# Altium PCB 0810-T.PcbDoc
Units mm, origin at the board's own origin, x right, y up, seen from the top; angles counter-clockwise.
Board outline 28.8 x 9.6 mm, 4 copper layers (TopLayer, MidLayer1, MidLayer14, BottomLayer); 56 components, 35 nets, 144 pads, 45 vias.
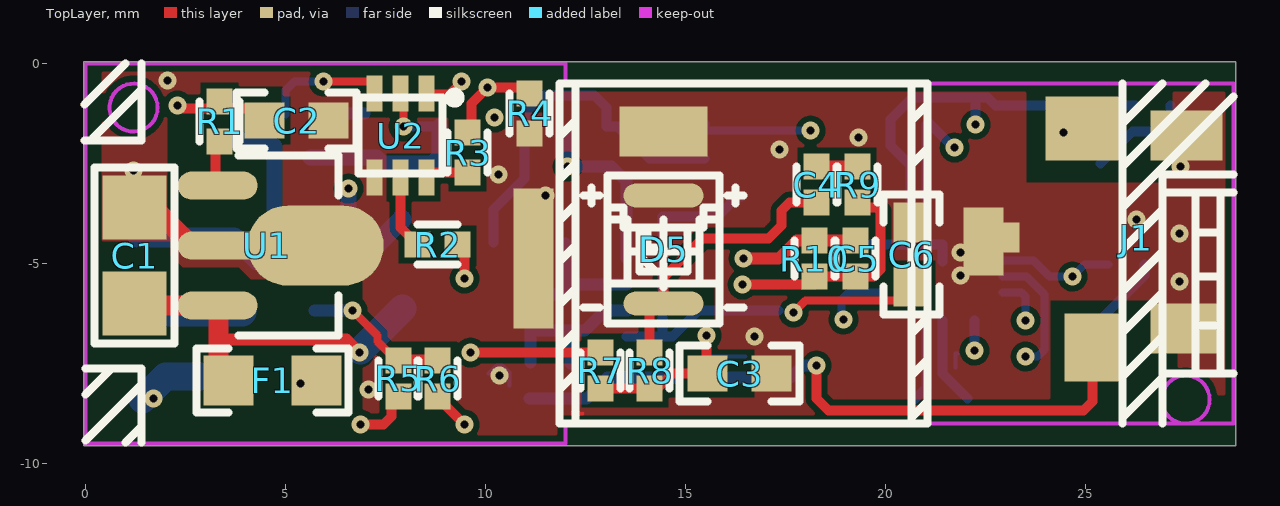
[diagram p0: TopLayer view]
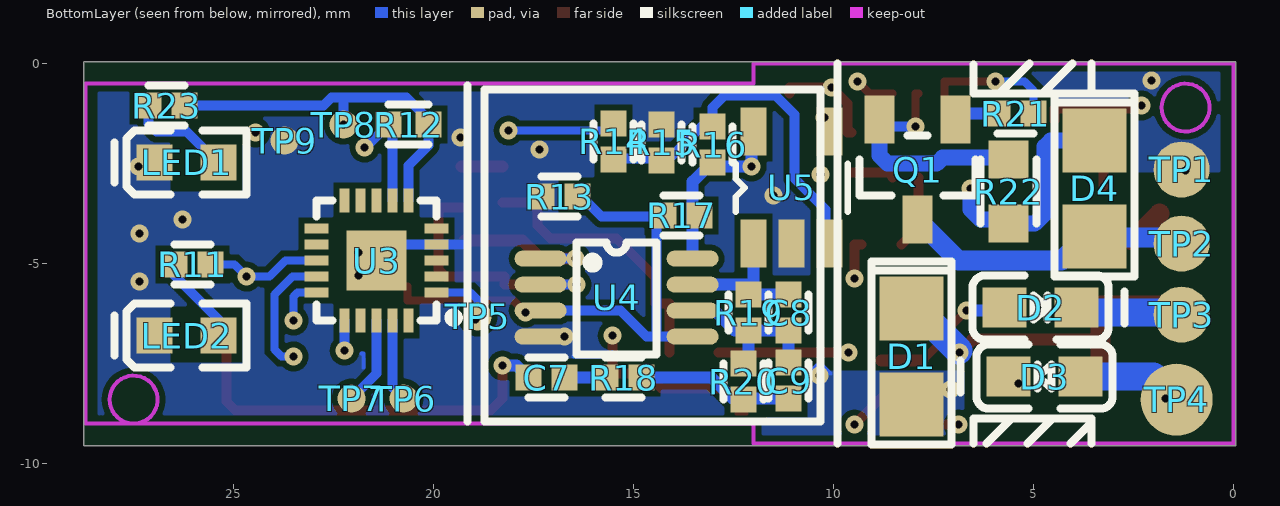
[diagram p1: BottomLayer view, seen from below]
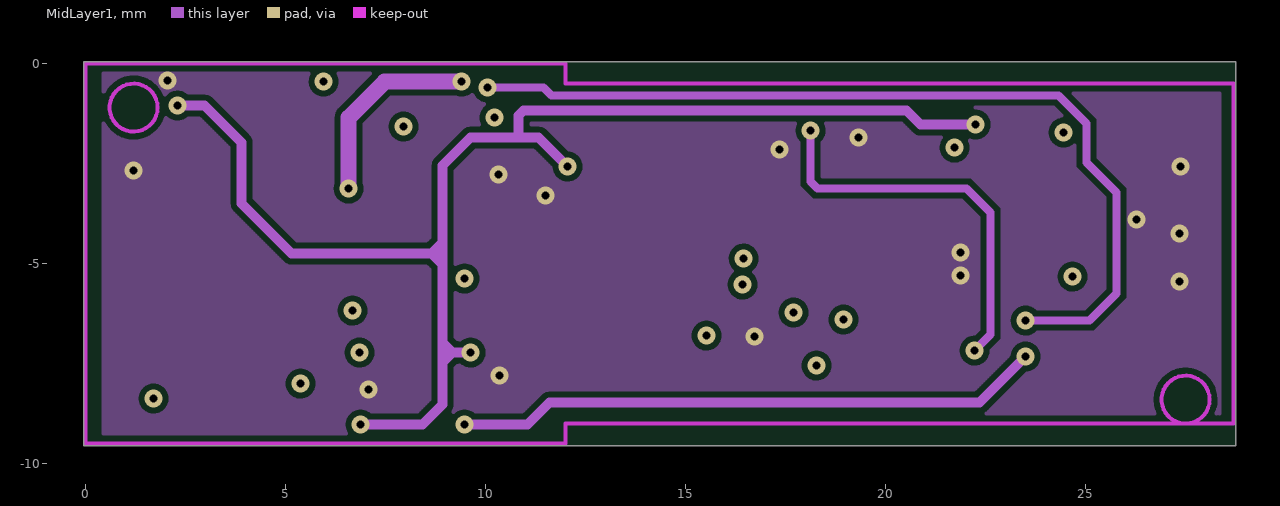
[diagram p2: MidLayer1]
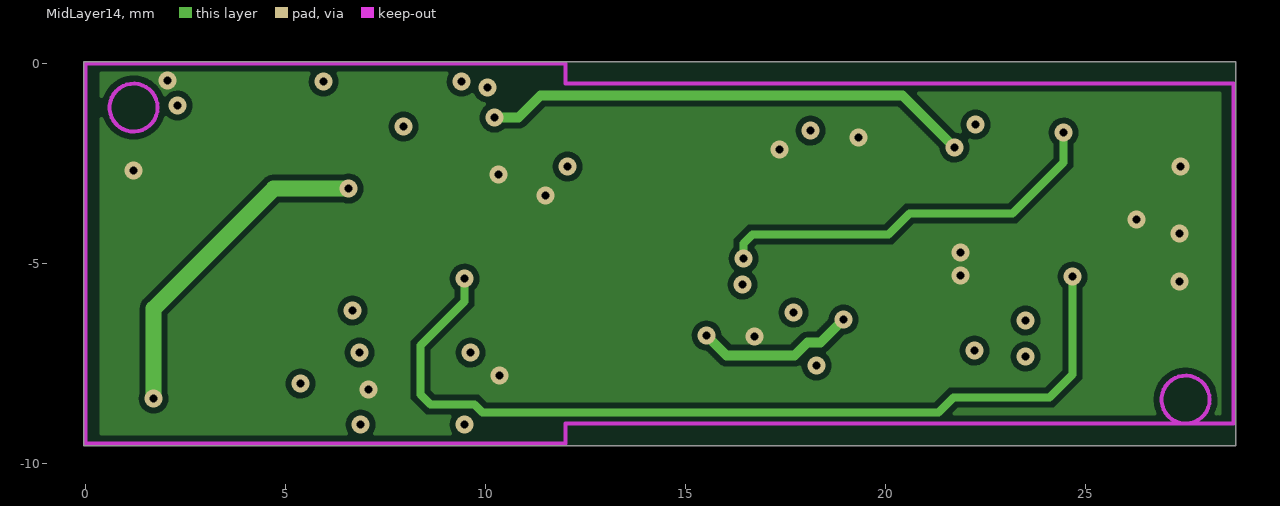
[diagram p3: MidLayer14]

## Layer stack, top to bottom
TopLayer: signal copper 0.0356
Dielectric: dielectric 0.32, FR-4, Dk 4.8
MidLayer1: signal copper 0.0356
Dielectric: dielectric 0.32, FR-4, Dk 4.8
MidLayer14: signal copper 0.0356
Dielectric: dielectric 0.32, FR-4, Dk 4.8
BottomLayer: signal copper 0.0356

## Board outline
-0.05,-9.55 28.75,-9.55 28.75,0.05 -0.05,0.05

## Design rules (kind name [scope] priority, off if disabled: settings)
Clearance [All] p1: gap=0.1
ComponentClearance [All] p1 off: gap=0.254 collisioncheckmode=0 verticalgap=0.254
PolygonConnect [All] p1: connectstyle=Relief reliefconductorwidth=0.254 reliefentries=4 polygonreliefangle="90 Angle"
RoutingLayers [All] p1: top layer_v5=TRUE mid layer 1_v5=FALSE mid layer 14_v5=FALSE bottom layer_v5=TRUE
RoutingVias [All] p1: holewidth=0.711 width=1.27 viastyle="Through Hole" minholewidth=0.711 minwidth=1.27 maxholewidth=0.711 maxwidth=1.27
SolderMaskExpansion [All] p1: expansion=0.051
TestPointUsage [All] p1: valid=0 allowmultiple=FALSE
Testpoint [All] p1: side=15 testpointundercomponent=TRUE minsize=1.016 maxsize=2.54 preferedsize=1.524 minholesize=0.508 maxholesize=1.016 preferedholesize=0.813 testpointgrid=0.025 style=1023 order=0123456789
Width [All] p1: maxlimit=0.254 minlimit=0.254 preferedwidth=0.254
17 further rules are at their usual default settings.

## Components (designator, comment, footprint, x,y, rotation, side; value= is the part's Value field where it differs from the comment)
C1 "1uF" 1206 1.225,-6 r90 top
C2 "10uF" 0805#1 6.075,-1.425 r180 top
C3 "10uF" 0805#1 17.15,-7.75 r180 top
C4 "470PF" 0402#1 18.275,-2.575 r270 top
C5 "2PF" 0402#1 19.25,-4.425 r270 top
C6 "10uF" 0805#1 20.65,-5.575 r90 top
C7 "100nF" 0402#2 16.725,-7.85 r180 bottom
C8 "10PF" 0402#1 11.125,-5.775 r270 bottom
C9 "1nF" 0402#1 11.125,-7.475 r270 bottom
D1 "M1" 1206 8.05,-8.525 r90 bottom
D2 "W2" 0805A 3.925,-6.1 r90 bottom
D3 "W2" 0805A 5.625,-7.825 r270 bottom
D4 "CM" 1206 3.475,-4.325 r90 bottom
D5 "F5红外线接收管" LED5.0 14.45,-3.3 r0 top
F1 "V" 0805#2 3.575,-7.925 r0 top
J1 "电位器板" SIP4 25.175,-7.1 r0 top
LED1 "黄色LED" 0603 25.375,-2.475 r180 bottom
LED2 "红色LED" 0603 25.375,-6.8 r180 bottom
Q1 "AKR" SOT-23 6.95,-1.4 r180 bottom
R1 "10R" 0402#3 3.35,-0.95 r270 top
R2 "4.7K" 0402#3 9.3,-4.525 r180 top
R3 "20K" 0402#3 9.55,-1.725 r270 top
R4 "3.9K" 0402#3 11.1,-0.75 r270 top
R5 "10K" 0402#1 7.825,-7.425 r270 top
R6 "10K" 0402#1 8.8,-7.425 r270 top
R7 "10K" 0402#1 12.875,-7.225 r270 top
R8 "200K" 0402#1 14.1,-7.225 r270 top
R9 "10K" 0402#1 19.3,-2.575 r270 top
R10 "470K" 0402#1 18.225,-4.425 r270 top
R11 "4.7K" 0402#2 25.575,-5.025 r180 bottom
R12 "47K" 0402#4 21.125,-1.525 r0 bottom
R13 "10K" 0402#2 16.4,-3.325 r180 bottom
R14 "150K" 0402#1 15.5,-1.5 r270 bottom
R15 "8.2K" 0402#1 14.3,-1.525 r270 bottom
R16 "10K" 0402#1 13.025,-1.575 r270 bottom
R17 "10K" 0402#2 13.35,-3.8 r180 bottom
R18 "1K" 0402#2 14.8,-7.85 r180 bottom
R19 "30K" 0402#1 12.125,-5.775 r270 bottom
R20 "1K" 0402#1 12.25,-7.5 r270 bottom
R21 "20K" 0402#2 5,-1.25 r180 bottom
R22 "3R/3R0" 0603L 5.625,-4 r90 bottom
R23 "2.2K" 0402#2 26.225,-1.05 r180 bottom
TP1 "" SIP1#1 1.3,-2.65 r0 bottom
TP2 "" SIP1#1 1.3,-4.5 r0 bottom
TP3 "" SIP1#1 1.3,-6.275 r0 bottom
TP4 "" SIP1#2 1.425,-8.4 r0 bottom
TP5 "" SIP1#3 18.9,-6.325 r0 bottom
TP6 "" SIP1#3 20.75,-8.375 r0 bottom
TP7 "" SIP1#3 22.05,-8.375 r0 bottom
TP8 "" SIP1#3 22.25,-1.525 r0 bottom
TP9 "" SIP1#3 23.725,-1.925 r0 bottom
U1 "78L05" SOT89 3.3,-3.05 r0 top
U2 "1AG" SOP-6A 8.525,-0.75 r90 top
U3 "???" QFN20 19.925,-5.725 r270 bottom
U4 "GS358" MSOP-8A 17.325,-4.875 r90 bottom
U5 "V331R" SOP5D 12,-4.5 r270 bottom

## Footprints (in the part's own frame and the unit in brackets; to place one, negate y for a bottom-side part, rotate by r counter-clockwise, add the part's x,y. Pads: shape width x height; smd on the part's side, far side on the other; paste and mask are expansions set on the pad)
0402#1 [mm]
  rect 0.65x0.65 smd: 1(0,0) 2(0.9,0)
  silkscreen extent 0,-0.5 0.9,0.5
0402#2 [mm]
  rect 0.65x0.65 smd: 1(0,0) 2(-0.9,0)
  silkscreen extent -0.9,-0.5 0,0.5
0402#3 [mm]
  rect 0.65x0.65 smd: 1(0,0) 2(1,0)
  silkscreen extent 0,-0.5 1,0.5
0402#4 [mm]
  rect 0.65x0.65 smd: 1(0,0) 2(-1,0)
  silkscreen extent -1,-0.5 0,0.5
0603 [mm]
  rect 0.9x0.9 smd: 1(0,0) 2(-1.6,0)
  silkscreen extent -2.6,-0.8 0.7,0.8
0603L [mm]
  rect 0.95x1 smd: 1(0,0) 2(1.6,0)
  silkscreen extent 0,-0.7 1.6,0.7
0805#1 [mm]
  rect 1x0.9 smd: 1(0,0) 2(1.6,0)
  silkscreen extent -0.7,-0.7 2.3,0.7
0805#2 [mm]
  rect 1.25x1.25 smd: 1(0,0) 2(2.2,0)
  silkscreen extent -0.8,-0.8 3,0.8
0805A [mm]
  rect 1x1.1 smd: 1(0,0) 2(0,1.8)
  silkscreen extent -0.8,-1.2 0.8,2.6
1206 [mm]
  rect 1.6x1.6 smd: 1(0,0) 2(2.4,0)
  silkscreen extent -1,-1 3.4,1
LED5.0 [mm]
  oval 2x0.6 smd: 1(0,0) 2(0,-2.7)
  silkscreen extent -2,-3.2 2,0.5
MSOP-8A [mm]
  oval 0.4x1.3 smd: 1(0,0) 2(-0.65,0) 3(-1.3,0) 4(-1.95,0) 5(-1.95,-3.8) 6(-1.3,-3.8) 7(-0.65,-3.8) 8(0,-3.8)
  silkscreen extent -2.4,-2.9 0.4,-0.9
QFN20 [mm]
  rect 0.25x0.6 smd: 1(0,0) 2(-0.4,0) 3(-0.8,0) 4(-1.2,0) 5(-1.6,0) 11(-1.6,-3) 12(-1.2,-3) 13(-0.8,-3) 14(-0.4,-3) 15(0,-3)
  rect 0.6x0.25 smd: 6(-2.3,-0.7) 7(-2.3,-1.1) 8(-2.3,-1.5) 9(-2.3,-1.9) 10(-2.3,-2.3) 16(0.7,-2.3) 17(0.7,-1.9) 18(0.7,-1.5) 19(0.7,-1.1) 20(0.7,-0.7)
  rect 1.5x1.5 smd: 21(-0.8,-1.5)
  silkscreen extent -2.3,-3 0.7,0.5
SIP1#1 [mm]
  round 1.4 smd: 1(0,0)
SIP1#2 [mm]
  round 1.8 smd: 1(0,0)
SIP1#3 [mm]
  round 0.7 smd: 1(0,0)
SIP4 [mm]
  rect 1.4x1.7 smd: 1(0,0)
  rect 1.8x1.25 smd: 2(2.35,0.475) 3(2.35,5.3)
  rect 2x1.6 smd: 4(-0.175,5.475)
  silkscreen extent 0.75,-1.9 3.52,6.6
SOP5D [mm]
  rect 1.2x0.65 smd: 1(0,0) 2(0,0.95) 3(0,1.9) 4(-2.8,1.9) 5(-2.8,0)
  silkscreen extent -2,-0.45 -0.8,2.35
SOP-6A [mm]
  rect 0.9x0.4 smd: 1(0,0) 2(0,0.65) 3(0,1.3) 4(-2.1,1.3) 5(-2.1,0.65) 6(-2.1,0)
  silkscreen extent -2,-0.8 0,1.7
SOT89 [mm]
  oval 3.4x2 smd: 0(2.45,-1.5)
  oval 2x0.7 smd: 1(0,0) 3(0,-3)
  oval 2.4x0.7 smd: 2(0.2,-1.5)
  silkscreen extent 0.53,-3.75 3.03,0.75
SOT-23 [mm]
  rect 0.75x1.2 smd: 1(0,0) 2(-1.9,0) 3(-0.95,-2.5)
  silkscreen extent -2.4,-1.9 0.5,-0.4

## Free pads (board coordinates)
  rect 2.2x1.25 smd: 1(14.45,-1.7)
  rect 0.75x0.75 smd: 2(22.975,-4.35)
  rect 1x1.7 smd: 3(22.45,-4.45)
  rect 1x3.5 smd: 4(11.2,-4.875)

## Via types
v1: diameter 0.45, hole 0.2, TopLayer to BottomLayer, 45 vias

## Nets (pads, with @x,y where several pads share a name; then routed paths per layer and width w, separated by ;. In a path a pad name is that pad's centre, name@x,y a point inside that pad or via, vN(x,y) a via of type N, cw(c..) or ccw(c..) an arc to the next point about the centre after c; other vN are vias at no path point)
UnNamedNet1: C6.1 R13.1 R17.2 U4.3 U4.5 | length 12.6
  TopLayer w0.2: v1(17.7,-6.225) 18,-5.925 20.65,-5.925 C6.1
  BottomLayer w0.25: U4.5 14.675,-6.825 15.325,-6.175 U4.3 ; 14.425,-6.775 14.425,-3.825 15.8,-3.825 16.3,-3.325 R13.1
UnNamedNet2: C1.2 C2.1 C3.1 C6.2 D1.1 D5.1 J1.2 J1.3 LED1.2 LED2.2 pad.1 pad.2 pad.3 pad.4 R4.2 R13.2 R15.1 TP1.1 TP9.1 U1.0 U1.2 U2.4 U3.4 U3.21 U4.4 U5.2 | length 6.7
  TopLayer w0.1: 12.175,-8.75 12.425,-8.75
  TopLayer w0.5: C1.2@1.85,-3.75 U1.2@2.525,-4.425
  BottomLayer w0.1: 10.075,-7.75 10.275,-7.55 10.425,-7.55 10.6,-7.725 10.6,-8.05 ; v1@10.225,-7.675 v1@10.5,-7.675 ; v1@10.225,-7.625 v1@10.45,-7.625 ; 15.525,-7.225 15.525,-7.325 16.5,-7.325 ; 21.75,-7.6 21.75,-7.25 21.8,-7.25
  BottomLayer w0.25: 19.3,-4.525 U3.4 21.425,-4.525 U3.21@21.425,-4.95
  other v1: 7.075,-8.15 10.35,-7.8 16.725,-6.825 27.35,-5.45 21.875,-5.3 21.875,-4.725 27.35,-4.25 26.275,-3.9 11.5,-3.3 10.325,-2.775 1.2,-2.675 27.375,-2.575 17.35,-2.15 19.325,-1.85 2.05,-0.425
UnNamedNet3: C7.2 J1.1 | length 10.1
  TopLayer w0.25: v1(18.275,-7.55) 18.275,-8.375 18.575,-8.675 24.95,-8.675 25.175,-8.45 J1.1
  BottomLayer w0.3: C7.2 17.925,-7.55 v1(18.275,-7.55)
UnNamedNet4: C5.1 J1.4 R10.1 U4.1 | length 13.7
  TopLayer w0.3: v1@16.425,-4.875 17.325,-4.875 17.775,-4.425 C5.1@19.225,-4.425
  MidLayer14 w0.2: v1@16.45,-4.85 16.45,-4.5 16.675,-4.275 20.075,-4.275 20.6,-3.75 23.175,-3.75 24.45,-2.475 v1@24.45,-1.825
  BottomLayer w0.25: v1(16.45,-4.875) U4.1
  other v1: 24.45,-1.725
UnNamedNet5: C4.2 D5.2 R8.1 | length 7
  TopLayer w0.25: R8.1 14.1,-6 D5.2 14.45,-5.35 15.425,-4.375 17.075,-4.375 17.4,-4.05 17.4,-3.675 17.6,-3.475 C4.2
UnNamedNet6: C1.1 D1.2 F1.1 U1.3 | length 9.4
  TopLayer w0.3: 3.325,-6.9 6.525,-6.9 v1(6.85,-7.225)
  TopLayer w0.5: C1.1@1.2,-6.05 3.325,-6.05 3.325,-7.925 F1.1
  BottomLayer w0.7: v1@6.875,-7.175 D1.2@7.925,-6.125
UnNamedNet7: D3.1 F1.2
  other v1: 5.375,-8
UnNamedNet8: D3.2 D4.2 R22.1 TP4.1 U2.1 | length 22.5
  TopLayer w0.2: U2.1 9.1,-0.75 v1(9.4,-0.45)
  MidLayer1 w0.4: v1(6.575,-3.125) 6.575,-1.35 7.475,-0.45 v1@9.35,-0.45
  MidLayer14 w0.4: v1(1.7,-8.375) 1.7,-6.125 4.7,-3.125 v1(6.575,-3.125)
  BottomLayer w0.4: D4.2 4.575,-1.925 4.725,-2.075 4.725,-3.75 4.975,-4 R22.1 5.625,-3.9 6.325,-3.9 6.575,-3.65 v1(6.575,-3.125)
  BottomLayer w0.7: TP4.1 2,-7.825 D3.2@3.75,-7.825
UnNamedNet9: Q1.2 R22.2 U2.2 | length 5.9
  TopLayer w0.2: U2.2 7.95,-0.75 v1@7.95,-1.55
  BottomLayer w0.252: v1(7.95,-1.575) Q1.2@8.85,-1.575
  BottomLayer w0.4: R22.2@5.625,-2.35 7.275,-2.35 7.425,-2.5 8.65,-2.5 8.85,-2.3 Q1.2@8.85,-1.575
UnNamedNet10: R21.1 U2.3 | length 3.2
  TopLayer w0.2: v1(5.95,-0.45) 7.225,-0.45 U2.3@7.225,-0.775
  BottomLayer w0.2: R21.1@5,-1.275 5,-0.675 5.225,-0.45 v1(5.95,-0.45)
UnNamedNet11: R3.2 U2.6 | length 1.2
  TopLayer w0.25: U2.6 8.525,-2.725 R3.2
UnNamedNet12: R2.2 U2.5 | length 1.9
  TopLayer w0.25: U2.5 7.875,-4.1 R2.2
UnNamedNet13: R1.2 U1.1 | length 1.2
  TopLayer w0.25: U1.1@3.25,-3.075 3.25,-1.95 R1.2
UnNamedNet14: C4.1 R9.1 | length 1
  TopLayer w0.3: C4.1 R9.1
UnNamedNet15: C5.2 R9.2 R10.2 U4.2 | length 6.7
  TopLayer w0.25: v1(16.425,-5.525) 18.225,-5.525 R10.2 19.7,-5.325 19.875,-5.15 19.875,-3.7 19.775,-3.6 R9.2@19.3,-3.6
  BottomLayer w0.25: v1@16.45,-5.525 U4.2
UnNamedNet16: C3.2 R7.2 R8.2 TP5.1 U3.1 | length 9.3
  TopLayer w0.25: R7.2 14.3,-8.125 14.675,-7.75 15.525,-7.75 v1(15.525,-6.8)
  MidLayer14 w0.25: v1(15.525,-6.8) 16.025,-7.3 17.725,-7.3 18.05,-6.975 18.375,-6.975 v1(18.95,-6.4)
  BottomLayer w0.2: TP5.1@18.9,-6.35 18.9,-5.9 19.075,-5.725 U3.1
UnNamedNet17: C2.2 R1.1 R5.2 R7.1 R12.2 R16.2 R17.1 R23.1 TP8.1 U3.6 U4.8 U5.5 | length 57.4
  TopLayer w0.25: v1(2.3,-1.05) 2.3,-1.125 4.475,-1.125 C2.2 ; v1(6.875,-9.025) 7.45,-9.025 7.65,-8.825 7.65,-8.325 R5.2 ; v1(9.625,-7.225) R7.1
  MidLayer1 w0.25: v1(2.3,-1.05) 2.975,-1.05 3.9,-1.975 3.9,-3.5 5.15,-4.75 8.875,-4.75 8.65,-4.75 ; v1(6.875,-9.025) 8.425,-9.025 8.925,-8.525 8.925,-2.55 9.625,-1.85 11.325,-1.85 v1(12.05,-2.575) ; 8.925,-7.475 9.175,-7.225 ; 8.925,-5.025 8.65,-4.75 ; v1(9.625,-7.225) 8.95,-7.225 9.175,-7.225 ; 10.825,-1.8 10.825,-1.3 10.95,-1.175 20.525,-1.175 20.875,-1.525 v1(22.25,-1.525) ; 8.65,-4.75 8.9,-4.5 8.65,-4.75 ; 9.175,-7.225 8.925,-6.975 9.175,-7.225
  BottomLayer w0.25: U3.6 20.625,-2.55 20.125,-2.05 20.125,-1.4 20.675,-0.85 22.55,-0.85 22.75,-1.05 R23.1@26.25,-1.05 ; v1(22.25,-1.525) 22.25,-0.875
  BottomLayer w0.3: U5.5@12.05,-1.7 v1(12.05,-2.575) 13.15,-2.575 13.525,-2.95 U4.8
UnNamedNet18: R6.2 U3.14 | length 18.8
  TopLayer w0.25: R6.2@8.8,-8.35 v1(9.475,-9.025)
  MidLayer1 w0.25: v1(9.475,-9.025) 11.05,-9.025 11.6,-8.475 22.35,-8.475 v1(23.5,-7.325)
  BottomLayer w0.2: U3.14 23.525,-5.325 23.975,-5.775 23.975,-7.15 23.8,-7.325 v1(23.5,-7.325)
UnNamedNet19: D2.2 R5.1 R6.1 | length 3.7
  TopLayer w0.2: v1(6.675,-6.175) 7.3,-6.8 7.3,-6.95 R5.1@7.775,-7.425
  TopLayer w0.3: R5.1@7.775,-7.425 R6.1
  BottomLayer w0.3: D2.2@5.725,-6.175 v1(6.675,-6.175)
UnNamedNet20: R3.1 R4.1 U3.15 | length 26.3
  TopLayer w0.25: R3.1 9.65,-1.725 9.65,-1 v1(10.05,-0.6) 11.1,-0.6 R4.1
  MidLayer1 w0.2: v1(10.05,-0.6) 11.45,-0.6 11.65,-0.8 24.325,-0.8 25.025,-1.5 25.025,-2.475 25.775,-3.225 25.775,-5.75 25.1,-6.425 v1(23.5,-6.425)
  BottomLayer w0.2: U3.15 23.4,-5.725 23.5,-5.825 v1(23.5,-6.425)
UnNamedNet21: R2.1 R11.1 U3.13 | length 26.6
  TopLayer w0.25: R2.1 9.475,-4.525 v1(9.475,-5.375)
  MidLayer14 w0.2: v1@9.475,-5.4 9.475,-5.95 8.375,-7.05 8.375,-8.275 8.625,-8.525 9.725,-8.525 9.925,-8.725 21.325,-8.725 21.7,-8.35 24.1,-8.35 24.675,-7.775 v1(24.675,-5.325)
  BottomLayer w0.2: U3.13 23.7,-4.925 24.1,-5.325 v1(24.675,-5.325) 24.975,-5.025 R11.1
UnNamedNet22: R14.1 U3.16 | length 13.3
  MidLayer1 w0.2: v1(18.125,-1.675) 18.125,-2.95 18.3,-3.125 22.025,-3.125 22.625,-3.725 22.625,-6.775 v1(22.225,-7.175)
  BottomLayer w0.2: R14.1 15.5,-1.675 v1(18.125,-1.675)
  BottomLayer w0.25: v1(22.225,-7.175) U3.16
UnNamedNet23: R14.2 R15.2 R16.1 U5.3 | length 9.1
  BottomLayer w0.252: U5.3@10.2,-4.475 10.2,-3.65 10.975,-2.875 10.975,-1.275 11.45,-0.8 12.725,-0.8 13.025,-1.1 R16.1 13.3,-1.575 14.1,-2.375 R14.2@15.475,-2.375
UnNamedNet24: LED1.1 R23.2 | length 2.6
  BottomLayer w0.25: LED1.1@25.375,-2.5 26.175,-1.7 26.925,-1.7 27.125,-1.5 R23.2
UnNamedNet25: LED2.1 R11.2 | length 2.2
  BottomLayer w0.25: LED2.1 25.375,-6.4 26.475,-5.3 R11.2
UnNamedNet26: C8.1 R19.1 U4.7 U5.1 | length 3.6
  BottomLayer w0.3: C8.1 12,-5.775 U5.1 ; R19.1@12.075,-5.525 U4.7
UnNamedNet27: C8.2 C9.1 R19.2 R20.1 U4.6 | length 4.3
  BottomLayer w0.3: C9.1 C8.2 R19.2 ; R20.1@12.125,-7.5 R19.2 ; U4.6@13.55,-6.175 12.975,-6.175 12.475,-6.675 R19.2
UnNamedNet28: C9.2 R18.1 R20.2 | length 3.9
  BottomLayer w0.3: C9.2@11.1,-8.375 12.525,-8.375 13.05,-7.85 R18.1@14.75,-7.85
UnNamedNet29: C7.1 R18.2 | length 1.1
  BottomLayer w0.3: R18.2@15.675,-7.85 C7.1
UnNamedNet30: D2.1 TP3.1 | length 2.7
  BottomLayer w0.7: TP3.1@1.3,-6.225 3.925,-6.225 D2.1
UnNamedNet31: D4.1 Q1.3 TP2.1 | length 7.3
  BottomLayer w0.5: TP2.1@1.3,-4.35 3.725,-4.35 4.3,-4.925 6.875,-4.925 Q1.3
UnNamedNet32: Q1.1 R21.2 | length 1.1
  BottomLayer w0.3: R21.2 Q1.1@6.975,-1.25
UnNamedNet33: R12.1 U3.7 U5.4 | length 15.1
  MidLayer14 w0.25: v1(10.225,-1.35) 10.825,-1.35 11.375,-0.8 20.425,-0.8 v1(21.725,-2.1)
  BottomLayer w0.25: U3.7 21.025,-1.525 21.075,-1.475 v1@21.675,-2.075
UnNamedNet43: TP7.1 U3.18 | length 2.2
  BottomLayer w0.25: U3.18 21.425,-7.75 TP7.1
UnNamedNet44: TP6.1 U3.19 | length 2.1
  BottomLayer w0.25: TP6.1 21.025,-8.1 U3.19
pads on no net: U3.2 U3.3 U3.5 U3.8 U3.9 U3.10 U3.11 U3.12 U3.17 U3.20

## Polygon pours and split planes (outlines as drawn)
UnNamedNet2 on TopLayer "TopLayer-UnNamedNet2" (hatched 90Degree grid 0.05 track 0.1, remove dead copper, pour order 1000): 0.45,0 0.45,-4.4 2.175,-4.4 2.175,-4.775 2.45,-5.05 3.85,-5.05 4.15,-5.35 6.975,-5.35 6.975,-9.475 24.075,-9.475 24.075,-5.875 26.7,-5.875 26.7,-7.175 27.35,-7.175 27.35,-8.25 28.7,-8.25 28.7,-0.5 27.225,-0.5 27.225,-2.675 26.875,-3.025 23.475,-3.025 23.475,-0.5 11.975,-0.5 11.975,0
UnNamedNet2 on MidLayer1 "MidLayer1-UnNamedNet2" (hatched 90Degree grid 0.05 track 0.1, remove dead copper, pour order 1001): 0.45,0 0.45,-9.5 28.35,-9.5 28.35,0
UnNamedNet2 on MidLayer14 "MidLayer14-UnNamedNet2" (hatched 90Degree grid 0.05 track 0.1, remove dead copper, pour order 1002): 0.4,-9.5 0.4,0 28.35,0 28.35,-9.5
UnNamedNet2 on BottomLayer "BottomLayer-UnNamedNet2" (hatched 90Degree grid 0.05 track 0.1, remove dead copper, pour order 1003): 0,0 0,-2.675 10.525,-2.675 10.525,-7.3 10.1,-7.725 6.775,-7.725 6.775,-9.5 28.35,-9.5 28.35,0

## Keep-outs
KeepOutLayer:
  circle w0.1: c27.5,-8.4 r0.6
  circle w0.1: c1.2,-1.1 r0.6
  lines w0.1: 0,-9.5 12,-9.5 12,-9 28.7,-9 28.7,-0.5 12,-0.5 12,0 0,0 0,-9.5

## Silkscreen, mask and mechanical layers (free items; w line width, h text height)
TopOverlay:
  lines w0.2: -0.025,-1.925 1.4,-1.925 1.4,0 ; -0.025,-1.025 1,0 ; 0,-9.425 1.4,-8.025 ; 0,-8.275 0.65,-7.625 ; 0,-7.625 1.4,-7.625 1.4,-9.475 ; 0.175,-1.875 1.375,-0.675 ; 1,-9.475 1.4,-9.075 ; 11.85,-8.15 12.25,-7.75 ; 11.85,-7.1 12.25,-6.7 ; 11.85,-6.025 12.25,-5.625 ; 11.85,-4.95 12.25,-4.55 ; 11.85,-3.925 12.25,-3.525 ; 11.85,-2.9 12.25,-2.5 ; 11.85,-1.825 12.25,-1.425 ; 12.25,-9 12.25,-0.5 ; 20.65,-9 20.65,-0.525 ; 20.65,-6.75 21.05,-6.35 ; 20.65,-2.525 21.05,-2.125 ; 20.65,-1.425 21.05,-1.025 ; 20.675,-8.825 21.05,-8.45 ; 20.675,-7.775 21.05,-7.4 ; 11.85,-9 21.05,-9 21.05,-0.5 11.85,-0.5 11.85,-9
BottomOverlay:
  lines w0.2: 3.55,-9.5 3.55,-8.875 6.5,-8.875 6.5,-9.5 ; 3.55,-8.975 4.075,-9.5 ; 3.55,0 3.55,-0.75 6.5,-0.75 6.5,-0.025 ; 4.025,0 4.775,-0.75 ; 4.525,-8.875 5.15,-9.5 ; 5.1,0 5.85,-0.75 ; 5.55,-8.875 6.175,-9.5 ; 9.9,-9.5 9.9,0 ; 19.15,-8.95 19.15,-0.55 ; 10.325,-8.95 18.725,-8.95 18.725,-0.65 10.325,-0.65 10.325,-8.95